# Altium PCB IMX425LLJ_MEZ.PcbDoc
Units mm, origin at the board's own origin, x right, y up, seen from the top; angles counter-clockwise.
Board outline 68 x 58.6 mm, 4 copper layers (Top Layer, AVDD, DVDD, Bottom Layer), stack 0.603 mm thick; 4 components, 29 nets, 260 pads, 222 vias.
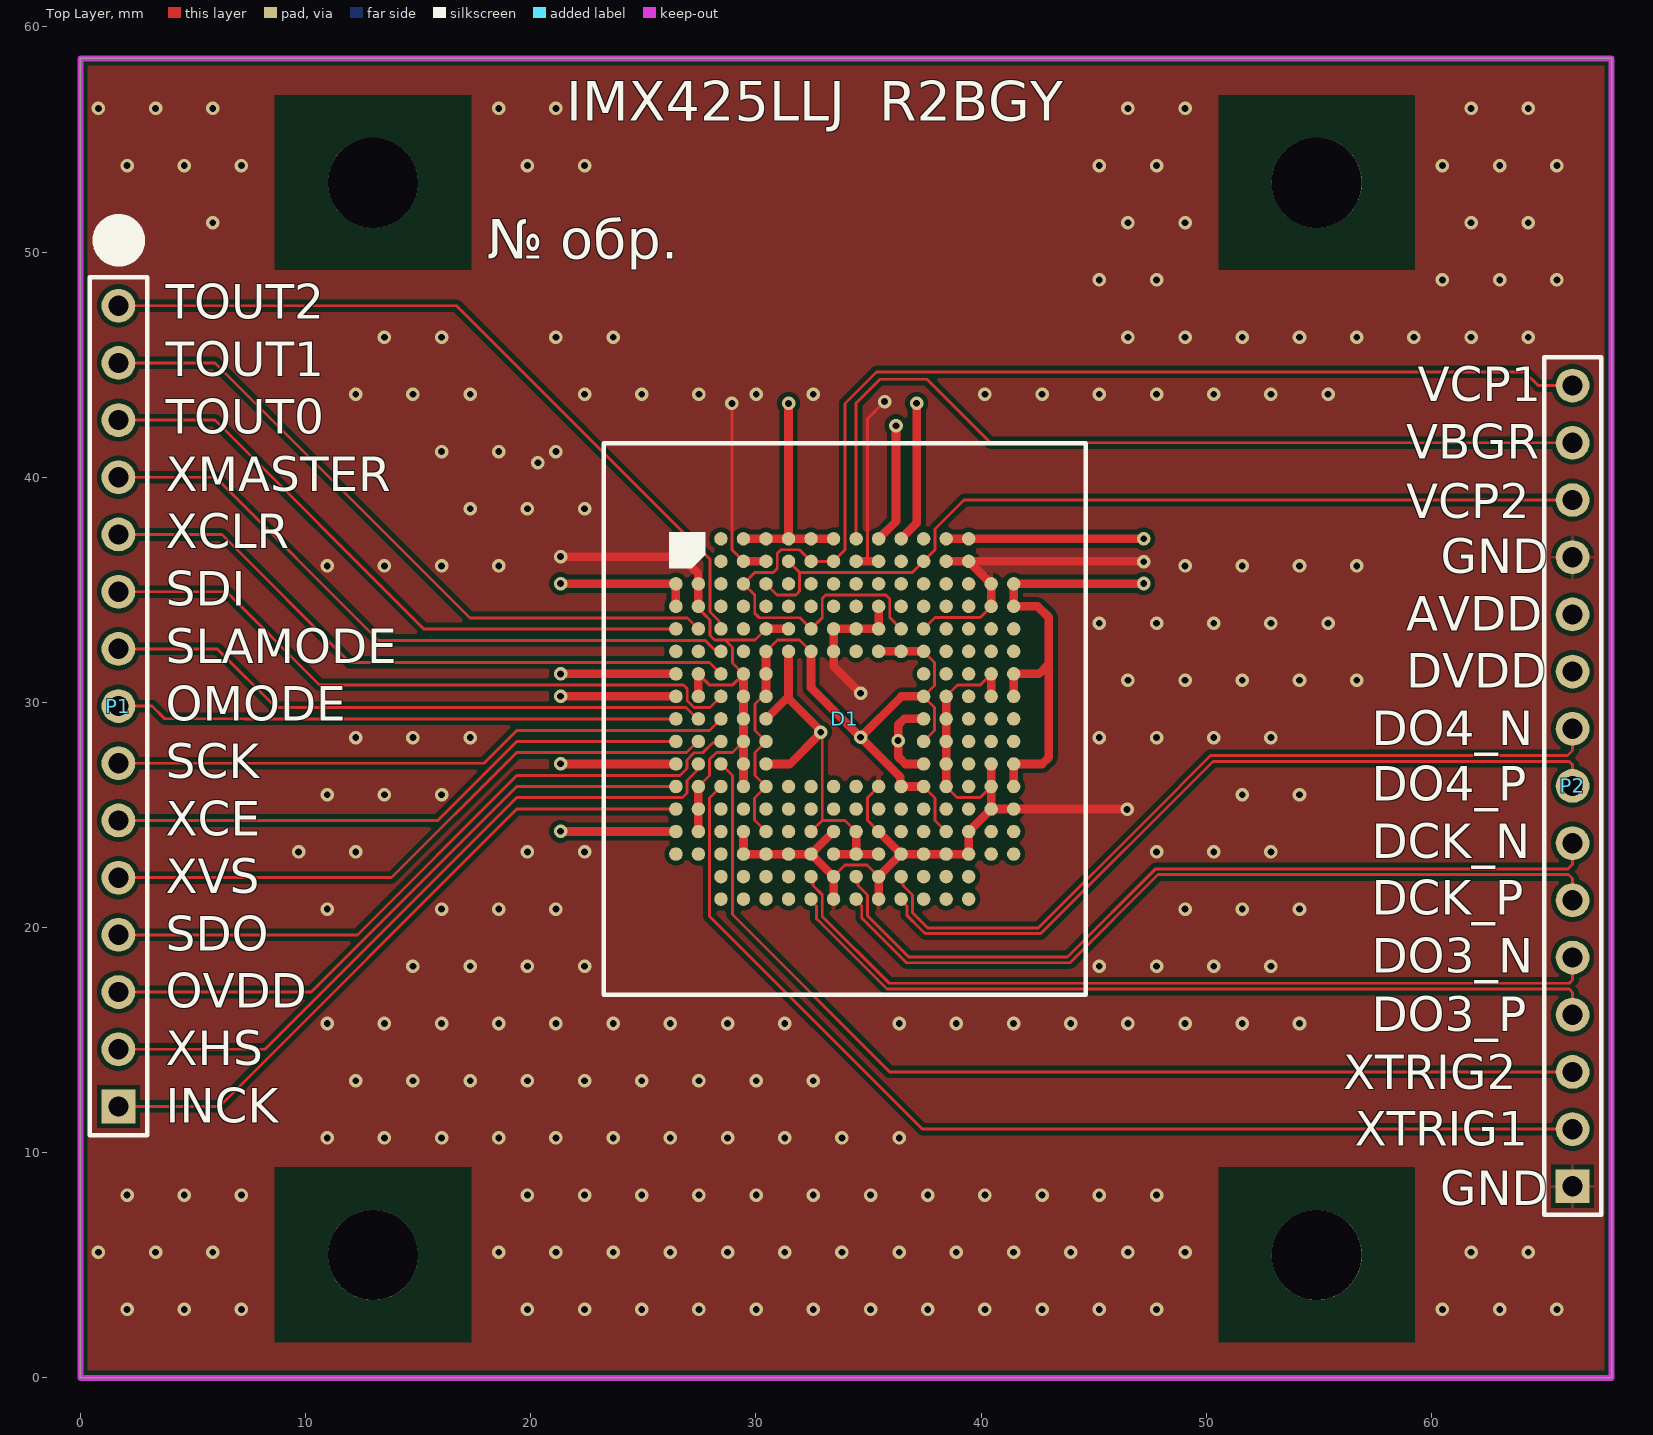
[diagram p0: Top Layer view]
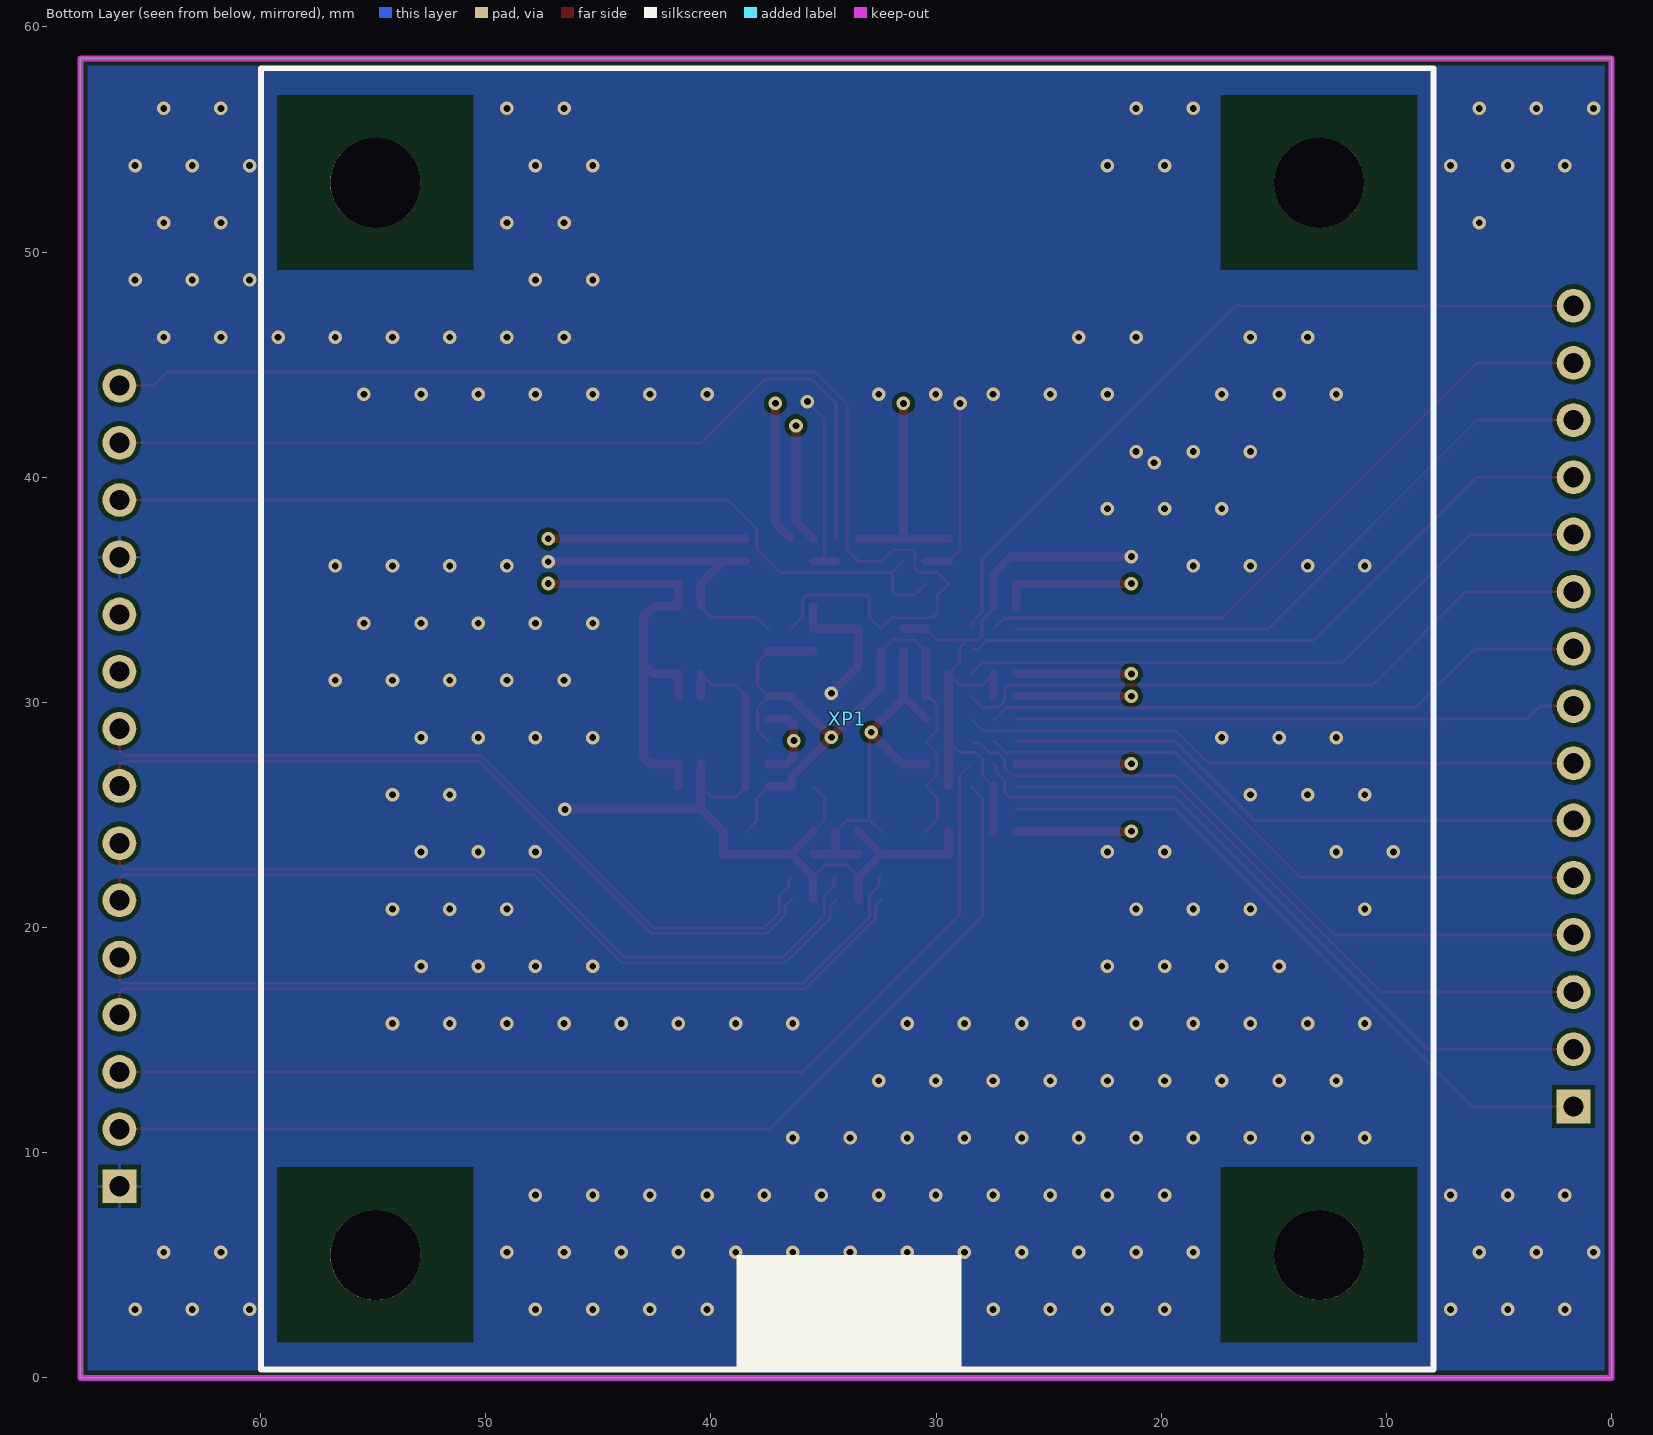
[diagram p1: Bottom Layer view, seen from below]
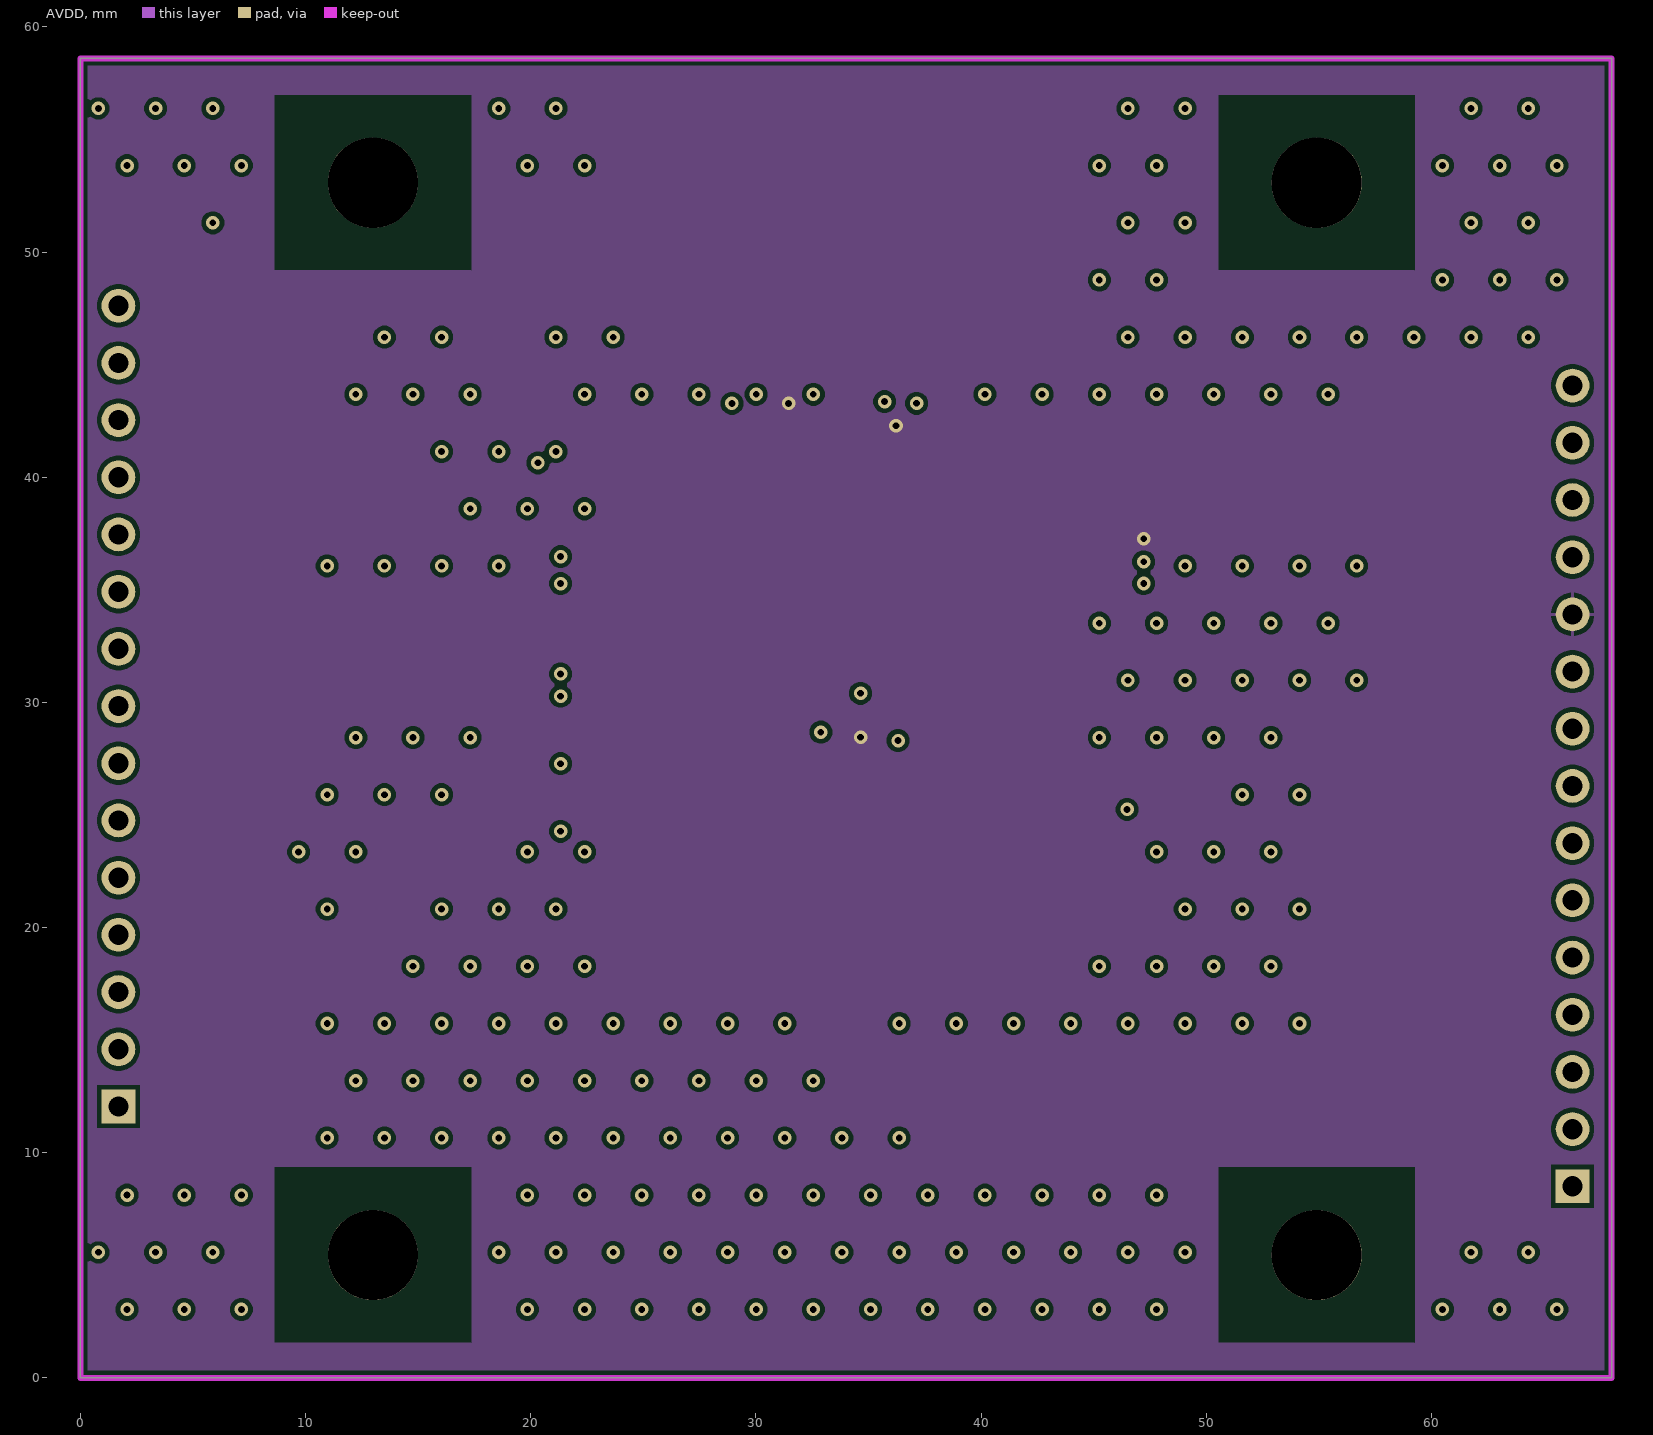
[diagram p2: AVDD]
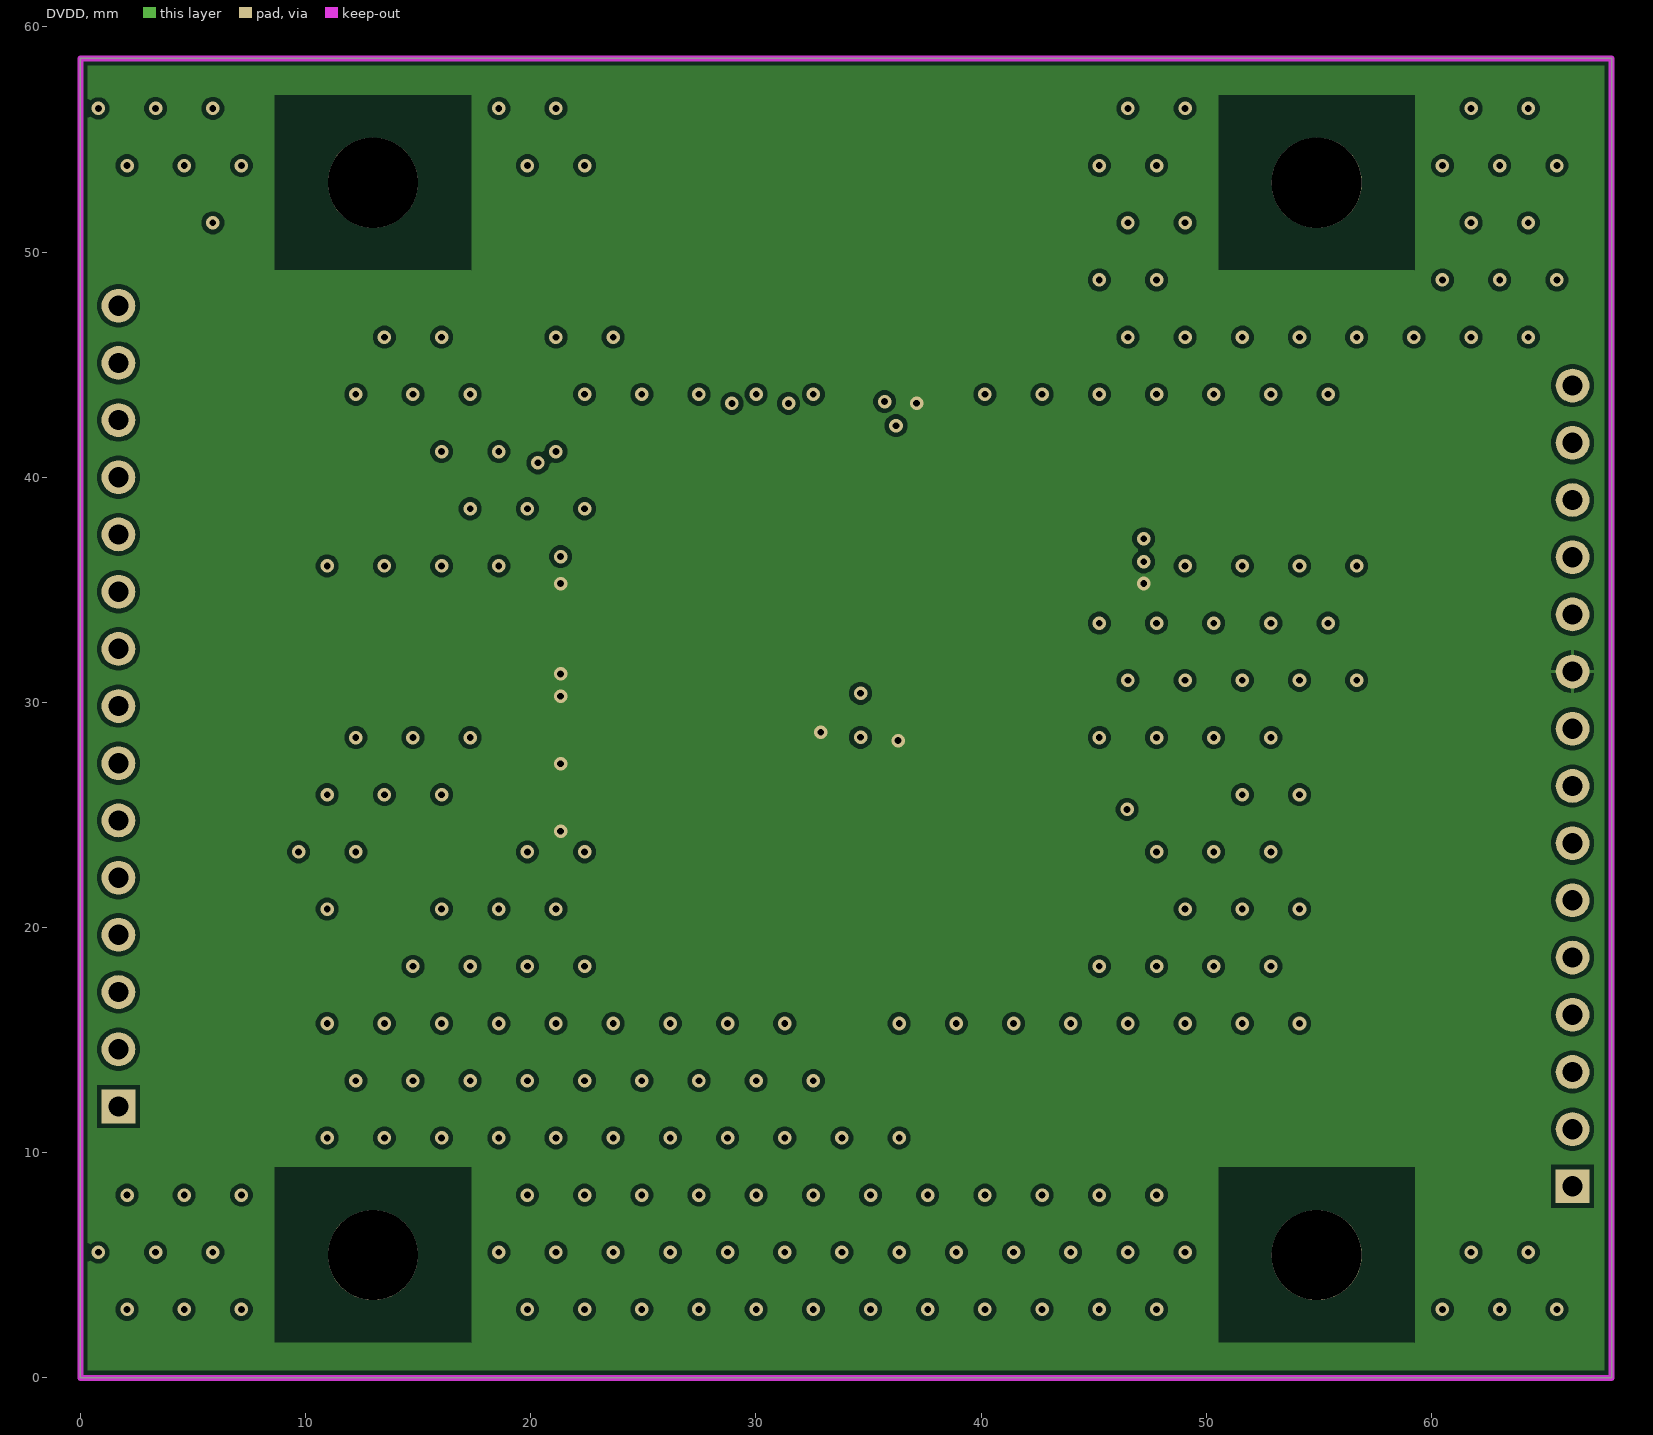
[diagram p3: DVDD]

## Layer stack, top to bottom
Top Solder: solder mask 0.0102, Solder Resist, Dk 3.5
Top Layer: signal copper 0.0356
Dielectric 2: prepreg 0.0711, PP-006, Dk 4.1
AVDD: signal copper 0.035
Dielectric 1: dielectric 0.32, FR-4, Dk 4.8
DVDD: signal copper 0.035
Dielectric 3: prepreg 0.0711, PP-006, Dk 4.1
Bottom Layer: signal copper 0.0356
Bottom Solder: solder mask 0.0102, Solder Resist, Dk 3.5

## Board outline
0,0 0,58.6 68,58.6 68,0

## Design rules (kind name [scope] priority, off if disabled: settings)
BoardOutlineClearance [OnLayer('Multi-Layer')] p1: gap=0.254 ignorepadtopadclearanceinfootprint=FALSE except(0: Arc-SplitContinuation Track-SplitContinuation SMDPad-SplitContinuation THPad-SplitContinuation Via-SplitContinuation Fill-SplitContinuation Poly-SplitContinuation Region-SplitContinuation Text-SplitContinuation; 0.4: Arc-OutlineEdge Track-OutlineEdge SMDPad-OutlineEdge THPad-OutlineEdge Via-OutlineEdge Fill-OutlineEdge Poly-OutlineEdge Region-OutlineEdge Text-OutlineEdge)
Clearance [All] p1: gap=0.125 ignorepadtopadclearanceinfootprint=FALSE except(0.2: Arc-Fill Arc-Poly Track-Fill Track-Poly SMDPad-Fill SMDPad-Poly THPad-Fill THPad-Poly Via-Fill Via-Poly Fill-Fill Fill-Poly Poly-Poly Poly-Region Poly-Text; 0.25: Arc-Hole Track-Hole SMDPad-Hole THPad-Hole Via-Hole Fill-Hole Poly-Hole Region-Hole Text-Hole) // Standart
DiffPairsRouting [All] p1: maxlimit=0.254 minlimit=0.127 mostfreqgap=0.13 toplayer_minwidth=0.127 toplayer_maxwidth=0.381 toplayer_prefwidth=0.37 midlayer1_minwidth=0.127 midlayer1_maxwidth=0.381 midlayer1_prefwidth=0.37 midlayer2_minwidth=0.127 midlayer2_maxwidth=0.381 midlayer2_prefwidth=0.37 bottomlayer_minwidth=0.127 bottomlayer_maxwidth=0.381 bottomlayer_prefwidth=0.37 maxuncoupledlength=12.7
HoleSize [All] p1: absolutevalues=TRUE maxlimit=5 minlimit=0.3 maxpercent=80.000 minpercent=20.000
MinimumSolderMaskSliver [All] p1: minsoldermaskwidth=0.1
PlaneClearance "PlaneClearance-1 1/2 Oz" [All] p1: clearance=0.2 // Standart
PlaneConnect "TermalConnect-1 1/2 Oz" [All] p1: planeconnectstyle=Relief reliefexpansion=0.2 reliefentries=4 reliefconductorwidth=0.2 reliefairgap=0.2 // Standart
PolygonConnect "PolygonConnect-1 1/2 Oz" [All] p1: thpad.connectstyle=Relief thpad.reliefconductorwidth=0.15 thpad.reliefentries=4 thpad.polygonreliefangle="90 Angle" thpad.airgapwidth=0.2 smdpad.connectstyle=Relief smdpad.reliefconductorwidth=0.2 smdpad.reliefentries=4 smdpad.polygonreliefangle="90 Angle" smdpad.airgapwidth=0.2 via.connectstyle=Direct via.reliefconductorwidth=0.254 via.reliefentries=4 via.polygonreliefangle="90 Angle" via.airgapwidth=0.254 // Standart
RoutingVias [All] p1: holewidth=0.3 width=1.27 viastyle="Through Hole" minholewidth=0.3 minwidth=0.6 maxholewidth=0.711 maxwidth=1.27
SilkToSilkClearance [All] p1: silktosilkclearance=0
SilkToSolderMaskClearance [IsPad] p1: minsilkscreentomaskgap=0 clearancetoexposedcopper=TRUE
SolderMaskExpansion [All] p1: expansion=0.102 istentingtop=FALSE
UnRoutedNet [All] p1: checkbadconnections=TRUE
Width [All] p1: maxlimit=2.5 minlimit=0.125 preferedwidth=0.37
22 further rules are at their usual default settings.

## Classes and differential pairs
differential pair DO4: +DO4_P -DO4_N
differential pair DO3: +DO3_P -DO3_N
differential pair DCK: +DCK_P -DCK_N

## Components (designator, comment, footprint, x,y, rotation, side; value= is the part's Value field where it differs from the comment)
D1 "IMX425LLJC" IMX425LLJC 33.947,29.265 r90 top
P1 "Header 15" HDR1X15 1.689,12.057 r90 top
P2 "Header 15" HDR1X15 66.269,8.509 r90 top
XP1 "Грелка" Грелка 12.992,53.078 r90 bottom

## Footprints (in the part's own frame and the unit in brackets; to place one, negate y for a bottom-side part, rotate by r counter-clockwise, add the part's x,y. Pads: shape width x height; smd on the part's side, far side on the other; paste and mask are expansions set on the pad)
HDR1X15 [mm] "Connector; Header; 15 Position"
  rect 1.5x1.5 hole 0.9: 1(0,0)
  round 1.5 hole 0.9: 2(2.54,0) 3(5.08,0) 4(7.62,0) 5(10.16,0) 6(12.7,0) 7(15.24,0) 8(17.78,0) 9(20.32,0) 10(22.86,0) 11(25.4,0) 12(27.94,0) 13(30.48,0) 14(33.02,0) 15(35.56,0)
  silkscreen extent -1.27,-1.27 36.83,1.27
IMX425LLJC [mm] "LGA, 81-Leads, Body 11,00x11,00mmx3,50mm, Pitch 1,00mm"
  round 0.6 smd: A3(8,5.5) A4(8,4.5) A5(8,3.5) A6(8,2.5) A7(8,1.5) A8(8,0.5) A9(8,-0.5) A10(8,-1.5) A11(8,-2.5) A12(8,-3.5) A13(8,-4.5) A14(8,-5.5) B3(7,5.5) B4(7,4.5) B5(7,3.5) B6(7,2.5) B7(7,1.5) B8(7,0.5) B9(7,-0.5) B10(7,-1.5) B11(7,-2.5) B12(7,-3.5) B13(7,-4.5) B14(7,-5.5) C1(6,7.5) C2(6,6.5) C3(6,5.5) C4(6,4.5) C5(6,3.5) C6(6,2.5) C7(6,1.5) C8(6,0.5) C9(6,-0.5) C10(6,-1.5) C11(6,-2.5) C12(6,-3.5) C13(6,-4.5) C14(6,-5.5) C15(6,-6.5) C16(6,-7.5) D1(5,7.5) D2(5,6.5) D3(5,5.5) D4(5,4.5) D5(5,3.5) D6(5,2.5) D7(5,1.5) D8(5,0.5) D9(5,-0.5) D10(5,-1.5) D11(5,-2.5) D12(5,-3.5) D13(5,-4.5) D14(5,-5.5) D15(5,-6.5) D16(5,-7.5) E1(4,7.5) E2(4,6.5) E3(4,5.5) E4(4,4.5) E5(4,3.5) E6(4,2.5) E7(4,1.5) E8(4,0.5) E9(4,-0.5) E10(4,-1.5) E11(4,-2.5) E12(4,-3.5) E13(4,-4.5) E14(4,-5.5) E15(4,-6.5) E16(4,-7.5) F1(3,7.5) F2(3,6.5) F3(3,5.5) F4(3,4.5) F5(3,3.5) F6(3,2.5) F7(3,1.5) F8(3,0.5) F9(3,-0.5) F10(3,-1.5) F11(3,-2.5) F12(3,-3.5) F13(3,-4.5) F14(3,-5.5) F15(3,-6.5) F16(3,-7.5) G1(2,7.5) G2(2,6.5) G3(2,5.5) G4(2,4.5) G5(2,3.5) G12(2,-3.5) G13(2,-4.5) G14(2,-5.5) G15(2,-6.5) G16(2,-7.5) H1(1,7.5) H2(1,6.5) H3(1,5.5) H4(1,4.5) H5(1,3.5) H12(1,-3.5) H13(1,-4.5) H14(1,-5.5) H15(1,-6.5) H16(1,-7.5) J1(0,7.5) J2(0,6.5) J3(0,5.5) J4(0,4.5) J5(0,3.5) J12(0,-3.5) J13(0,-4.5) J14(0,-5.5) J15(0,-6.5) J16(0,-7.5) K1(-1,7.5) K2(-1,6.5) K3(-1,5.5) K4(-1,4.5) K5(-1,3.5) K12(-1,-3.5) K13(-1,-4.5) K14(-1,-5.5) K15(-1,-6.5) K16(-1,-7.5) L1(-2,7.5) L2(-2,6.5) L3(-2,5.5) L4(-2,4.5) L5(-2,3.5) L12(-2,-3.5) L13(-2,-4.5) L14(-2,-5.5) L15(-2,-6.5) L16(-2,-7.5) M1(-3,7.5) M2(-3,6.5) M3(-3,5.5) M4(-3,4.5) M5(-3,3.5) M6(-3,2.5) M7(-3,1.5) M8(-3,0.5) M9(-3,-0.5) M10(-3,-1.5) M11(-3,-2.5) M12(-3,-3.5) M13(-3,-4.5) M14(-3,-5.5) M15(-3,-6.5) M16(-3,-7.5) N1(-4,7.5) N2(-4,6.5) N3(-4,5.5) N4(-4,4.5) N5(-4,3.5) N6(-4,2.5) N7(-4,1.5) N8(-4,0.5) N9(-4,-0.5) N10(-4,-1.5) N11(-4,-2.5) N12(-4,-3.5) N13(-4,-4.5) N14(-4,-5.5) N15(-4,-6.5) N16(-4,-7.5) P1(-5,7.5) P2(-5,6.5) P3(-5,5.5) P4(-5,4.5) P5(-5,3.5) P6(-5,2.5) P7(-5,1.5) P8(-5,0.5) P9(-5,-0.5) P10(-5,-1.5) P11(-5,-2.5) P12(-5,-3.5) P13(-5,-4.5) P14(-5,-5.5) P15(-5,-6.5) P16(-5,-7.5) R1(-6,7.5) R2(-6,6.5) R3(-6,5.5) R4(-6,4.5) R5(-6,3.5) R6(-6,2.5) R7(-6,1.5) R8(-6,0.5) R9(-6,-0.5) R10(-6,-1.5) R11(-6,-2.5) R12(-6,-3.5) R13(-6,-4.5) R14(-6,-5.5) R15(-6,-6.5) R16(-6,-7.5) T3(-7,5.5) T4(-7,4.5) T5(-7,3.5) T6(-7,2.5) T7(-7,1.5) T8(-7,0.5) T9(-7,-0.5) T10(-7,-1.5) T11(-7,-2.5) T12(-7,-3.5) T13(-7,-4.5) T14(-7,-5.5) U3(-8,5.5) U4(-8,4.5) U5(-8,3.5) U6(-8,2.5) U7(-8,1.5) U8(-8,0.5) U9(-8,-0.5) U10(-8,-1.5) U11(-8,-2.5) U12(-8,-3.5) U13(-8,-4.5) U14(-8,-5.5)
  silkscreen extent -12.25,-10.7 12.25,10.7, body extent -12.25,-10.7 12.25,10.7, height 2.62
Грелка [mm]
  round 4 hole 4 unplated: 0(-47.625,0) 0(-47.625,41.91) 0(0,0) 0(0,41.91)
  silkscreen extent -52.7,-5.08 5.08,46.99

## Part data
P1 P2: "Header, 15-Pin", LatestRevisionDate=17-Jul-2002, LatestRevisionNote="Re-released for DXP Platform.", Publisher="Altium Limited"

## Via types
v1: diameter 0.6, hole 0.3, Top Layer to Bottom Layer, 222 vias

## Nets (pads, with @x,y where several pads share a name; then routed paths per layer and width w, separated by ;. In a path a pad name is that pad's centre, name@x,y a point inside that pad or via, vN(x,y) a via of type N, cw(c..) or ccw(c..) an arc to the next point about the centre after c; other vN are vias at no path point)
AVDD: D1.A4 D1.A5 D1.A6 D1.A7 D1.A8 D1.A10 D1.A13 D1.A14 D1.F5 D1.F7 D1.F10 D1.F11 D1.F12 D1.G5 D1.H5 D1.H12 D1.K5 D1.K12 D1.M5 D1.M11 D1.M12 D1.P5 D1.P13 P2.11 | length 57.3
  Top Layer w0.127: D1.P5 29.936,24.777 29.936,25.754 D1.M5 29.958,26.754 29.958,27.777 D1.K5 29.958,28.754 29.958,29.927 30.207,30.175 30.356,30.175 D1.H5 ; D1.F5 30.959,32.777 31.936,32.777 D1.F7 ; D1.M12 37.958,25.754 37.958,24.754 D1.P13 ; D1.K12 37.936,28.754 37.936,29.777 D1.H12 37.936,30.754 37.936,31.777 D1.F12
  Top Layer w0.381: D1.A4 D1.A5 D1.A6 ; D1.H5 D1.G5 D1.F5 ; v1(31.447,43.28) D1.A6 ; D1.F7 32.447,30.647 v1(34.646,28.448) ; D1.A8 D1.A7 D1.A6 ; D1.F10 D1.F11 D1.F12 ; D1.A10 36.22,38.039 v1(36.22,42.291) ; D1.M12 D1.M11 36.405,26.307 36.405,26.689 v1(34.646,28.448) ; D1.H12 36.463,30.265 v1(34.646,28.448) ; D1.A13 D1.A14 v1(47.222,37.265)
DCK_N: D1.T9 P2.7 | length 36.7
  Top Layer w0.127: D1.T9 34.538,22.175 34.538,21.866 34.953,21.45 34.953,20.528 36.787,18.694 43.84,18.694 47.755,22.609 66.068,22.609 66.269,22.809 P2.7
DCK_P: D1.U9 P2.6 | length 36
  Top Layer w0.127: D1.U9 34.447,21.204 34.696,20.955 34.696,20.422 36.681,18.437 43.947,18.437 47.861,22.352 66.091,22.352 66.269,22.174 P2.6
DO3_N: D1.T7 P2.5 | length 37.6
  Top Layer w0.127: D1.T7 32.538,22.175 32.538,21.866 32.947,21.457 32.947,20.498 32.949,20.498 35.921,17.526 66.116,17.526 66.269,17.678 P2.5
DO3_P: D1.U7 P2.4 | length 36.9
  Top Layer w0.127: D1.U7 32.447,21.197 32.69,20.955 32.69,20.392 32.84,20.241 32.842,20.241 35.815,17.269 66.119,17.269 66.269,17.12 P2.4
DO4_N: D1.T11 P2.9 | length 35.6
  Top Layer w0.127: D1.T11 36.538,22.175 36.538,21.866 36.959,21.445 36.959,20.657 37.626,19.989 42.544,19.989 47.473,24.917 50.193,27.638 66.043,27.638 66.269,27.864 P2.9
DO4_P: D1.U11 P2.8 | length 34.9
  Top Layer w0.127: D1.U11 36.447,21.209 36.702,20.955 36.702,20.55 37.338,19.914 37.52,19.732 42.651,19.732 50.3,27.381 66.116,27.381 66.269,27.229 P2.8
DVDD: D1.A11 D1.C1 D1.C16 D1.D1 D1.D16 D1.F6 D1.G1 D1.G16 D1.H1 D1.H16 D1.J5 D1.J12 D1.L1 D1.L5 D1.L12 D1.L16 D1.M16 D1.P1 D1.P7 D1.P9 D1.R8 D1.R9 D1.R10 P2.10 | length 75
  Top Layer w0.127: D1.P7 32.944,24.762 ; v1@32.893,28.727 32.944,28.677 32.944,24.762 ; D1.P9 33.95,24.762 32.944,24.762
  Top Layer w0.381: v1@21.325,24.265 D1.P1 ; v1@21.325,31.267 v1(21.325,31.265) D1.G1 ; v1@21.336,27.265 D1.L1 ; v1@21.336,30.265 D1.H1 ; v1@21.336,35.265 D1.C1 D1.D1 ; D1.L5 31.507,27.265 32.784,28.542 32.784,28.559 32.893,28.668 32.893,28.727 31.447,30.173 31.447,30.265 ; D1.J5 31.447,30.265 ; D1.F6 31.447,30.265 ; D1.R8 D1.R9 ; D1.P9 D1.R9 ; D1.R10 D1.R9 ; D1.A11 37.135,37.953 v1(37.135,43.282) ; D1.L12 36.641,27.265 36.322,27.584 36.322,29.007 36.581,29.265 D1.J12 ; D1.M16 D1.L16 42.709,27.265 43.002,27.559 43.002,31.699 ; D1.H16 D1.G16 42.568,31.265 43.002,31.699 ; v1@47.219,35.281 47.203,35.265 D1.C16 D1.D16 42.519,34.265 43.002,33.782 43.002,31.699
  other v1: 21.325,24.277 21.325,27.277 36.311,28.307 32.882,28.679 21.325,30.277 21.325,35.277 47.222,35.281
GND: D1.B4 D1.B5 D1.B9 D1.B10 D1.B13 D1.B14 D1.C2 D1.C15 D1.D2 D1.D10 D1.D15 D1.E5 D1.E6 D1.E8 D1.E9 D1.E10 D1.E12 D1.F8 D1.G2 D1.G4 D1.G15 D1.H2 D1.H4 D1.H13 D1.H15 D1.J4 D1.J13 D1.K4 D1.K13 D1.L4 D1.L13 D1.L15 D1.M2 D1.M4 D1.M10 D1.M13 D1.M15 D1.N2 D1.N15 D1.N16 D1.P2 D1.P4 D1.P8 D1.P10 D1.P14 D1.R4 D1.R5 D1.R6 D1.R7 D1.R11 D1.R12 D1.R13 D1.R14 D1.T8 D1.T10 D1.U8 D1.U10 P2.1 P2.12 | length 106.1
  Top Layer w0.127: D1.M2 27.94,26.758 27.94,27.472 28.245,27.777 28.958,27.777 D1.K4 ; D1.G2 27.947,30.765 28.947,30.765 D1.G4 28.958,31.754 28.958,32.445 28.626,32.777 ; D1.D2 27.447,34.173 27.704,33.917 27.959,33.661 27.959,32.976 28.158,32.777 28.626,32.777 ; v1(28.936,43.28) 28.936,36.777 D1.B4 ; D1.M4 D1.M4@29.447,26.306 ; D1.E5 29.958,32.777 28.626,32.777 ; D1.T8 33.959,22.777 34.569,22.777 34.936,22.777 D1.T10 ; 34.947,36.265 34.947,42.592 v1(35.712,43.358) ; D1.P10 34.947,24.765 34.947,25.766 D1.M10 ; D1.E12 37.959,33.777 39.959,33.777 D1.D15 ; D1.M13 38.935,25.777 39.959,25.777 D1.M15 ; D1.H13 38.958,30.777 39.959,30.777 D1.G15
  Top Layer w0.381: v1(21.325,36.474) 26.695,36.474 27.44,35.729 27.44,35.272 D1.C2 D1.D2 ; D1.P2 D1.N2 D1.M2 ; D1.H2 D1.G2 ; D1.P4 D1.R4 D1.R5 D1.R6 D1.R7 ; D1.M4@29.447,26.306 D1.L4 D1.K4 D1.J4 D1.H4 D1.G4 ; D1.B4 D1.B5 ; D1.E5 D1.E6 ; D1.U8@33.426,21.245 D1.U8 D1.T8 D1.R7 ; D1.P8 D1.R7 ; D1.B9 34.947,36.265 D1.B10 ; v1(34.646,30.404) 33.447,31.602 D1.F8 D1.E8 D1.E9 D1.E10 D1.D10 ; D1.U10 D1.T10 D1.R11 ; D1.P10 D1.R11 ; D1.M13 D1.L13 D1.K13 D1.J13 D1.H13 ; D1.B13 D1.B14 ; D1.L15 D1.M15 D1.N15 ; D1.H15 D1.G15 ; D1.D15 D1.C15 D1.B14 ; v1(46.482,25.248) 46.464,25.265 D1.N16 D1.N15 ; v1@47.222,36.265 D1.B14 ; D1.R11 D1.R12 D1.R13 D1.R14 D1.P14 D1.N15
  other v1: 2.07,3.04 4.61,3.04 7.15,3.04 19.85,3.04 22.39,3.04 24.93,3.04 27.47,3.04 30.01,3.04 32.55,3.04 35.09,3.04 37.63,3.04 40.17,3.04 42.71,3.04 45.25,3.04 47.79,3.04 60.49,3.04 63.03,3.04 65.57,3.04 0.8,5.58 3.34,5.58 5.88,5.58 18.58,5.58 21.12,5.58 23.66,5.58 26.2,5.58 28.74,5.58 31.28,5.58 33.82,5.58 36.36,5.58 38.9,5.58 41.44,5.58 43.98,5.58 46.52,5.58 49.06,5.58 61.76,5.58 64.3,5.58 2.07,8.12 4.61,8.12 7.15,8.12 19.85,8.12 22.39,8.12 24.93,8.12 27.47,8.12 30.01,8.12 32.55,8.12 35.09,8.12 37.63,8.12 40.17,8.12 42.71,8.12 45.25,8.12 47.79,8.12 10.96,10.66 13.5,10.66 16.04,10.66 18.58,10.66 21.12,10.66 23.66,10.66 26.2,10.66 28.74,10.66 31.28,10.66 33.82,10.66 36.36,10.66 12.23,13.2 14.77,13.2 17.31,13.2 19.85,13.2 22.39,13.2 24.93,13.2 27.47,13.2 30.01,13.2 32.55,13.2 10.96,15.74 13.5,15.74 16.04,15.74 18.58,15.74 21.12,15.74 23.66,15.74 26.2,15.74 28.74,15.74 31.28,15.74 36.36,15.74 38.9,15.74 41.44,15.74 43.98,15.74 46.52,15.74 49.06,15.74 51.6,15.74 54.14,15.74 14.77,18.28 17.31,18.28 19.85,18.28 22.39,18.28 45.25,18.28 47.79,18.28 50.33,18.28 52.87,18.28 10.96,20.82 16.04,20.82 18.58,20.82 21.12,20.82 49.06,20.82 51.6,20.82 54.14,20.82 9.69,23.36 12.23,23.36 19.85,23.36 22.39,23.36 47.79,23.36 50.33,23.36 52.87,23.36 10.96,25.9 13.5,25.9 16.04,25.9 51.6,25.9 54.14,25.9 12.23,28.44 14.77,28.44 17.31,28.44 45.25,28.44 47.79,28.44 50.33,28.44 52.87,28.44 46.52,30.98 49.06,30.98 51.6,30.98 54.14,30.98 56.68,30.98 45.25,33.52 47.79,33.52 50.33,33.52 52.87,33.52 55.41,33.52 10.96,36.06 13.5,36.06 16.04,36.06 18.58,36.06 49.06,36.06 51.6,36.06 54.14,36.06 56.68,36.06 47.222,36.246 17.31,38.6 19.85,38.6 22.39,38.6 20.32,40.64 16.04,41.14 18.58,41.14 21.12,41.14 12.23,43.68 14.77,43.68 17.31,43.68 22.39,43.68 24.93,43.68 27.47,43.68 30.01,43.68 32.55,43.68 40.17,43.68 42.71,43.68 45.25,43.68 47.79,43.68 50.33,43.68 52.87,43.68 55.41,43.68 13.5,46.22 16.04,46.22 21.12,46.22 23.66,46.22 46.52,46.22 49.06,46.22 51.6,46.22 54.14,46.22 56.68,46.22 59.22,46.22 61.76,46.22 64.3,46.22 45.25,48.76 47.79,48.76 60.49,48.76 63.03,48.76 65.57,48.76 5.88,51.3 46.52,51.3 49.06,51.3 61.76,51.3 64.3,51.3 2.07,53.84 4.61,53.84 7.15,53.84 19.85,53.84 22.39,53.84 45.25,53.84 47.79,53.84 60.49,53.84 63.03,53.84 65.57,53.84 0.8,56.38 3.34,56.38 5.88,56.38 18.58,56.38 21.12,56.38 46.52,56.38 49.06,56.38 61.76,56.38 64.3,56.38
INCK: D1.N1 P1.1 | length 30.2
  Top Layer w0.127: P1.1 6.172,12.057 19.38,25.265 D1.N1
OMODE: D1.J1 P1.8 | length 25
  Top Layer w0.127: P1.8 3.183,29.837 3.749,29.271 7.254,29.271 7.26,29.265 D1.J1
OVDD: D1.M1 P1.3 | length 28.5
  Top Layer w0.127: P1.3 10.252,17.137 19.38,26.265 D1.M1
SCK: D1.J3 P1.7 | length 27.6
  Top Layer w0.127: P1.7 17.923,27.297 19.38,28.754 27.936,28.754 D1.J3
SDI: D1.H3 P1.10 | length 29.4
  Top Layer w0.127: P1.10 6.485,34.917 10.625,30.777 26.779,30.777 26.949,30.607 26.949,30.074 26.959,30.065 26.959,30.063 27.245,29.777 27.959,29.777 D1.H3
SDO: D1.K3 P1.4 | length 30.5
  Top Layer w0.127: P1.4 12.303,19.677 19.38,26.754 26.626,26.754 26.94,27.067 26.94,27.449 27.253,27.762 27.635,27.762 28.073,28.2 28.381,28.2 D1.K3
SLAMODE: D1.J2 P1.9 | length 27
  Top Layer w0.127: P1.9 6.079,32.377 8.687,29.769 26.896,29.769 27.4,29.265 D1.J2
TOUT0: D1.E1 P1.13 | length 28.6
  Top Layer w0.127: P1.13 5.977,42.537 15.249,33.265 D1.E1
TOUT1: D1.E2 P1.14 | length 30.7
  Top Layer w0.127: P1.14 5.977,45.077 17.3,33.754 26.959,33.754 D1.E2
TOUT2: D1.E3 P1.15 | length 34.2
  Top Layer w0.127: P1.15 16.696,47.617 27.956,36.357 27.956,34.02 28.359,33.617 28.359,33.354 D1.E3
VBGR: D1.A9 P2.14 | length 39.5
  Top Layer w0.127: D1.A9 34.447,43.286 35.509,44.348 37.592,44.348 40.411,41.529 P2.14
VCP1: D1.B7 D1.B8 D1.C4 D1.E7 D1.E11 P2.15 | length 56.1
  Top Layer w0.127: D1.E11 35.941,33.771 35.941,34.595 35.763,34.773 33.096,34.773 32.944,34.62 32.944,33.762 D1.E7 31.956,33.757 30.15,33.757 29.947,33.96 29.947,34.766 D1.C4 29.959,35.777 30.773,35.777 30.95,35.954 30.95,36.614 31.113,36.777 31.936,36.777 D1.B7 D1.B8 33.958,36.777 33.958,43.28 35.357,44.679 64.135,44.679 64.745,44.069 P2.15
VCP2: D1.B6 D1.B12 D1.C5 P2.13 | length 39.5
  Top Layer w0.127: D1.C5 30.94,34.773 31.775,34.773 31.936,34.933 31.936,35.777 ; D1.B6 31.936,35.777 ; P2.13 39.243,38.989 37.958,37.704 37.958,36.777 D1.B12 36.959,35.777 31.936,35.777
XCE: D1.K1 P1.6 | length 26.2
  Top Layer w0.127: P1.6 15.872,24.757 19.38,28.265 D1.K1
XCLR: D1.G3 P1.11 | length 29.3
  Top Layer w0.127: P1.11 6.282,37.457 11.963,31.775 19.38,31.775 27.937,31.775 D1.G3
XHS: D1.L2 P1.2 | length 31.5
  Top Layer w0.127: P1.2 8.2,14.597 19.38,25.777 26.742,25.777 26.936,25.97 26.936,26.529 27.356,26.95 27.356,27.175 D1.L2
XMASTER: D1.F3 P1.12 | length 30
  Top Layer w0.127: P1.12 6.002,39.997 13.245,32.754 26.023,32.754 27.749,32.754 28.147,32.356 28.356,32.356 D1.F3
XTRIG1: D1.M3 P2.2 | length 48.2
  Top Layer w0.127: D1.M3 27.936,25.754 27.936,20.502 37.389,11.049 P2.2
XTRIG2: D1.L3 P2.3 | length 47.1
  Top Layer w0.127: D1.L3 28.956,26.756 28.956,20.574 35.941,13.589 P2.3
XVS: D1.K2 P1.5 | length 28.3
  Top Layer w0.127: P1.5 13.82,22.217 19.38,27.777 26.911,27.777 27.4,28.265 D1.K2
pads on no net: D1.A3 D1.A12 D1.B3 D1.B11 D1.C3 D1.C6 D1.C7 D1.C8 D1.C9 D1.C10 D1.C11 D1.C12 D1.C13 D1.C14 D1.D3 D1.D4 D1.D5 D1.D6 D1.D7 D1.D8 D1.D9 D1.D11 D1.D12 D1.D13 D1.D14 D1.E4 D1.E13 D1.E14 D1.E15 D1.E16 D1.F1 D1.F2 D1.F4 D1.F9 D1.F13 D1.F14 D1.F15 D1.F16 D1.G12 D1.G13 D1.G14 D1.H14 D1.J14 D1.J15 D1.J16 D1.K14 D1.K15 D1.K16 D1.L14 D1.M6 D1.M7 D1.M8 D1.M9 D1.M14 D1.N3 D1.N4 D1.N5 D1.N6 D1.N7 D1.N8 D1.N9 D1.N10 D1.N11 D1.N12 D1.N13 D1.N14 D1.P3 D1.P6 D1.P11 D1.P12 D1.P15 D1.P16 D1.R1 D1.R2 D1.R3 D1.R15 D1.R16 D1.T3 D1.T4 D1.T5 D1.T6 D1.T12 D1.T13 D1.T14 D1.U3 D1.U4 D1.U5 D1.U6 D1.U12 D1.U13 D1.U14 XP1.0

## Polygon pours and split planes (outlines as drawn)
GND on Bottom Layer "Top Overlay-No Net" (solid, remove dead copper, pour order 2): 0,58.598 67.996,58.598 67.996,0 0,0
GND on Top Layer "Top Overlay-No Net" (solid, remove dead copper, pour order 3): 0,58.598 67.996,58.598 67.996,0 0,0
AVDD on AVDD "Top Overlay-No Net" (solid, remove dead copper, pour order 4): 0,58.6 68,58.6 68,0 0,0
DVDD on DVDD "Top Overlay-No Net" (solid, remove dead copper, pour order 5): 0,58.6 68,58.6 68,0 0,0

## Keep-outs
Keep-Out Layer:
  the board outline again, w0.254

## Other copper
Multi-Layer:
  pour cut-out: 17.348,1.56 17.348,9.346 8.636,9.346 8.636,1.585
  pour cut-out: 59.258,1.56 59.258,9.346 50.546,9.346 50.546,1.585
  pour cut-out: 59.258,49.185 59.258,56.971 50.546,56.971 50.546,49.21
  pour cut-out: 17.348,49.185 17.348,56.971 8.636,56.971 8.636,49.21

## Silkscreen, mask and mechanical layers (free items; w line width, h text height)
Top Overlay:
  circle w1.5: c1.702,50.521 r0.417
  text "IMX425LLJ  R2BGY" at 21.579,55.245 h3
  text "№ обр." at 18.075,49.135 h3
  text "TOUT2" at 3.785,47.041 h1.52
  text "TOUT1" at 3.785,44.49 h1.52
  text "VCP1" at 59.386,43.383 h1.52
  text "TOUT0" at 3.785,41.939 h1.52
  text "VBGR" at 58.878,40.818 h1.52
  text "XMASTER" at 3.785,39.388 h1.52
  text "VCP2" at 58.878,38.176 h1.52
  text "XCLR" at 3.785,36.837 h1.52
  text "GND" at 60.402,35.738 h1.52
  text "SDI" at 3.785,34.287 h1.52
  text "AVDD" at 58.878,33.173 h1.52
  text "SLAMODE" at 3.785,31.736 h1.52
  text "DVDD" at 58.878,30.658 h1.52
  text "OMODE" at 3.785,29.185 h1.52
  text "DO4_N" at 57.354,28.093 h1.52
  text "SCK" at 3.785,26.634 h1.52
  text "DO4_P" at 57.354,25.629 h1.52
  text "XCE" at 3.785,24.083 h1.52
  text "DCK_N" at 57.354,23.085 h1.52
  text "XVS" at 3.785,21.532 h1.52
  text "DCK_P" at 57.354,20.574 h1.52
  text "SDO" at 3.785,18.981 h1.52
  text "DO3_N" at 57.354,17.983 h1.52
  text "OVDD" at 3.785,16.43 h1.52
  text "DO3_P" at 57.354,15.393 h1.52
  text "XHS" at 3.785,13.88 h1.52
  text "XTRIG2" at 56.085,12.827 h1.52
  text "INCK" at 3.785,11.329 h1.52
  text "XTRIG1" at 56.592,10.313 h1.52
  text "GND" at 60.401,7.671 h1.52